# Altium PCB Cell Characterization Board V2.PcbDoc (part 3 of 3)
Units mm, origin at the board's own origin, x right, y up, seen from the top; angles counter-clockwise.
Board outline 180.24 x 170.15 mm, 4 copper layers (SIG1, GND, PWR, SIG2), stack 1.746 mm thick; 137 components, 113 nets, 550 pads, 376 vias.
Unrouted connection lines stored in the file: 58.
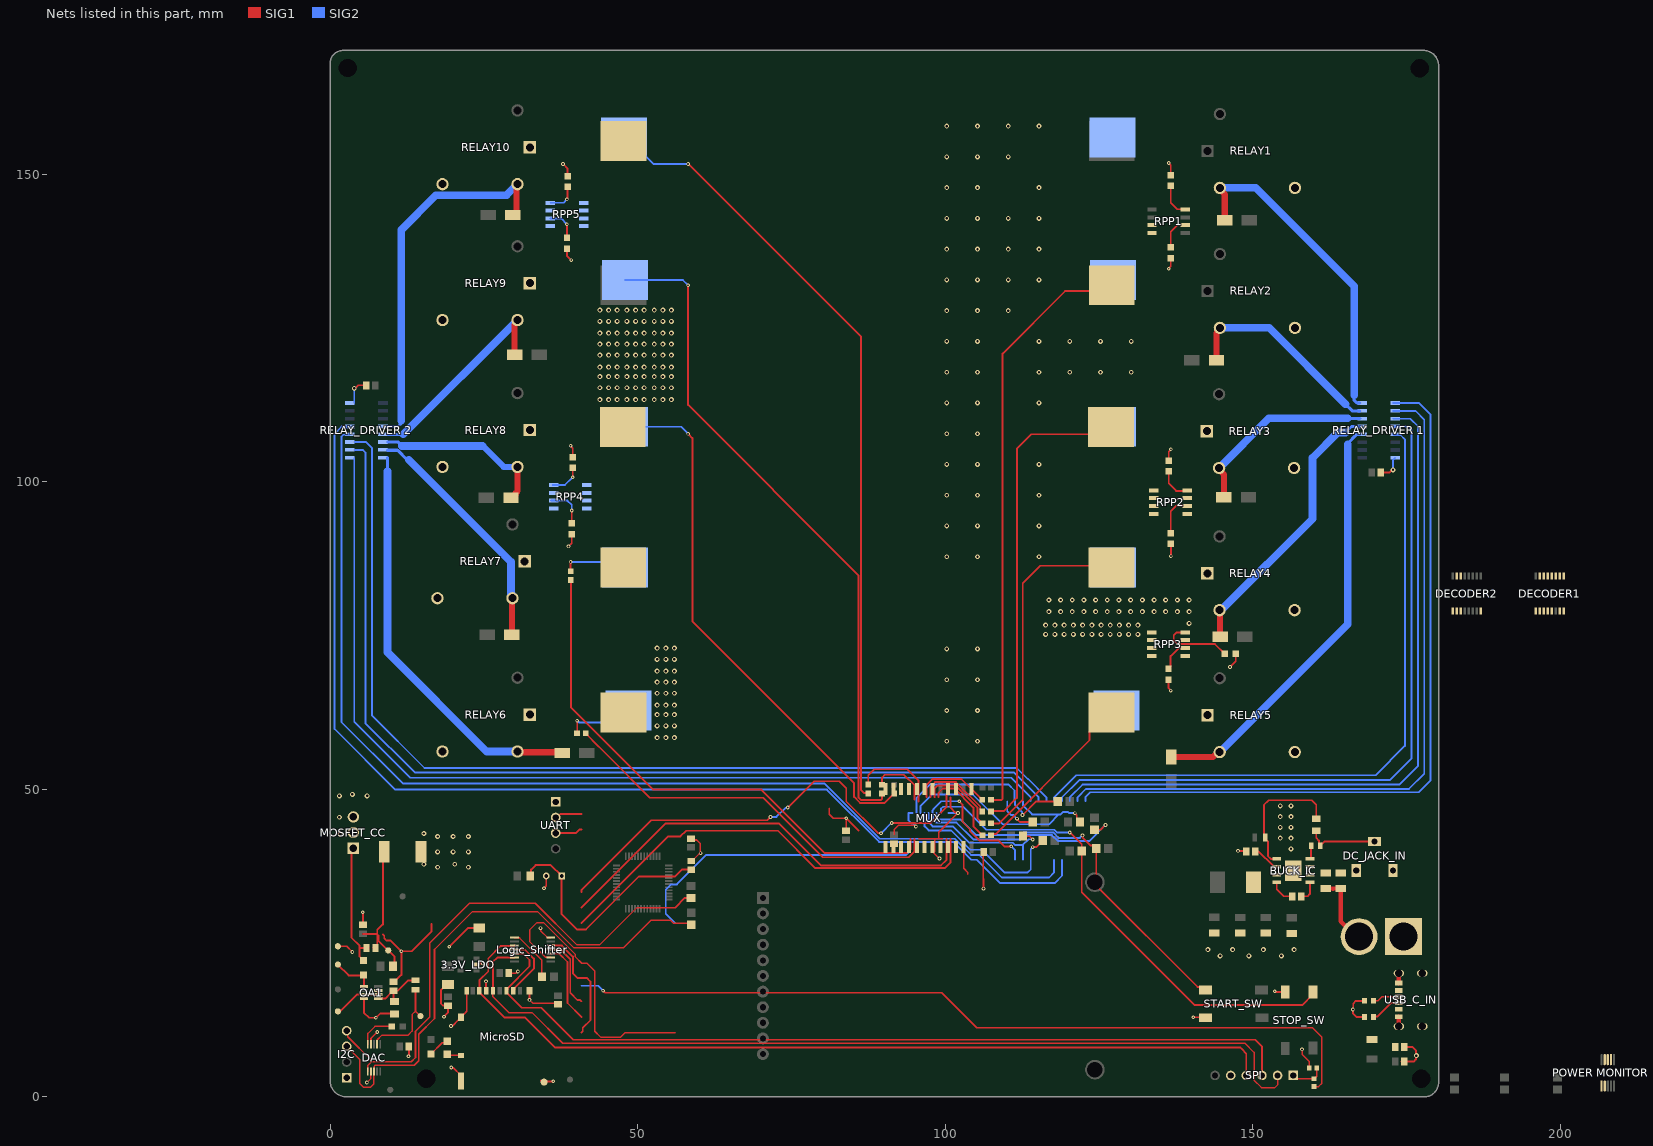
[diagram p4: the nets of this part, all layers, seen from the top]

## Via types
v1: diameter 0.8, hole 0.4, SIG1 to SIG2, tented both sides, 275 vias
v2: diameter 0.6, hole 0.3, SIG1 to SIG2, tented both sides, 92 vias
v3: diameter 1.27, hole 0.711, SIG1 to SIG2, tented both sides, 9 vias

## Nets (pads, with @x,y where several pads share a name; then routed paths per layer and width w, separated by ;. In a path a pad name is that pad's centre, name@x,y a point inside that pad or via, vN(x,y) a via of type N, cw(c..) or ccw(c..) an arc to the next point about the centre after c; other vN are vias at no path point) (continued)
CELL2_SIG: CELL2.2 R35.1 RPP1.7 RPP1.8 | length 96.7
  SIG1 w0.3: R35.1@107.444,48.287 109.171,48.287 109.347,48.463 109.347,120.853 119.516,131.022 126.143,131.022 CELL2.2@127.087,131.966
CELL3: RELAY3.1 RPP2.3
CELL3_SIG: CELL3.2 R34.1 RPP2.5 RPP2.6 | length 78.6
  SIG1 w0.3: R34.1@107.469,46.464 109.532,46.464 111.674,48.606 111.674,105.4 113.995,107.721 125.754,107.721 CELL3.2@126.96,108.928
CELL4: RELAY4.1 RPP2.1
CELL4_SIG: CELL4.2 R33.1 RPP2.7 RPP2.8 | length 57.7
  SIG1 w0.3: R33.1@107.479,44.454 108.782,44.454 112.615,48.287 112.615,83.532 115.446,86.363 126.74,86.363 CELL4.2@127.036,86.068
CELL5: RELAY5.1 RPP3.1
CELL5_SIG: CELL5.2 R32.1 RPP3.7 RPP3.8 | length 28.7
  SIG1 w0.3: R32.1@107.469,42.518 107.666,42.715 108.222,42.715 123.478,57.971 123.478,59.408 126.566,62.497 CELL5.2@127.061,62.497
CELL6: RELAY6.1 RPP3.3
  other v1: 139.665,76.986 116.865,78.886 118.765,78.886 120.665,78.886 122.565,78.886 124.465,78.886 126.365,78.886 128.265,78.886 130.165,78.886 132.065,78.886 133.965,78.886 135.865,78.886 137.765,78.886 139.665,78.886 116.865,80.786 118.765,80.786 120.665,80.786 122.565,80.786 124.465,80.786 126.365,80.786 128.265,80.786 130.165,80.786 132.065,80.786 133.965,80.786 135.865,80.786 137.765,80.786 139.665,80.786
CELL6_SIG: CELL6.2 R41.2 RPP3.5 RPP3.6 | length 11.3
  SIG1 w0.25: 40.167,59.131 v2(40.167,61.143)
  SIG2 w0.3: v2(40.167,61.143) 40.231,61.143 40.492,60.882 46.569,60.882 CELL6.2@48.501,62.814
  other v1: 116.347,75.189 117.847,75.189 119.347,75.189 120.847,75.189 122.347,75.189 123.847,75.189 125.347,75.189 126.847,75.189 128.347,75.189 129.847,75.189 131.347,75.189 116.347,76.689 117.847,76.689 119.347,76.689 120.847,76.689 122.347,76.689 123.847,76.689 125.347,76.689 126.847,76.689 128.347,76.689 129.847,76.689 131.347,76.689
CELL7: RELAY7.1 RPP4.1
CELL7_SIG: CELL7.2 R40.2 RPP4.7 RPP4.8 | length 10.7
  SIG1 w0.3: v2(39.116,86.978) 39.116,85.487 39.141,85.462
  SIG2 w0.3: v2(39.116,86.978) 47.019,86.978 CELL7.2@47.931,86.066
CELL8: RELAY8.1 RPP4.3
CELL8_SIG: CELL8.2 R39.1 RPP4.5 RPP4.6 | length 88.5
  SIG1 w0.3: v2(58.217,107.798) 58.903,107.112 58.903,77.296 85.208,50.99 85.208,48.757 86.162,47.803 90.179,47.803 91.383,49.007 91.406,49.007 91.712,49.313 R39.1@91.712,49.336
  SIG2 w0.3: CELL8.2@47.931,108.951 57.063,108.951 v2(58.217,107.798)
CELL9: RELAY9.1 RPP5.1
CELL9_SIG: CELL9.2 R38.1 RPP5.7 RPP5.8 | length 110.4
  SIG1 w0.3: v2(58.217,131.966) 58.217,112.497 85.907,84.807 85.907,48.681 86.344,48.243 89.562,48.243 89.738,48.419 R38.1@89.738,49.336
  SIG2 w0.3: CELL9.2@47.931,132.806 57.376,132.806 v2(58.217,131.966)
CELL10: RELAY10.1 RPP5.3
CELL10_SIG: CELL10.2 R37.1 RPP5.5 RPP5.6 | length 127
  SIG1 w0.3: v2(58.217,151.689) 86.347,123.559 86.347,49.856 86.777,49.426 87.433,49.426 R37.1@87.507,49.352
  SIG2 w0.3: CELL10.2@47.816,155.956 48.311,155.956 52.578,151.689 v2(58.217,151.689)
GND: 3.3V_LDO.2 "POWER MONITOR IC.1" "POWER MONITOR IC.2" "POWER MONITOR IC.7" "RELAY_DRIVER 1.8" "RELAY_DRIVER 2.8" BUCK_IC.7 BUCK_IC.9 C1.1 C2.1 C4.2 C5.1 C6.2 C7.2 C8.2 C9.2 C10.2 C11.2 C12.2 C14.1 C15.2 C16.2 C17.2 C19.1 C20.1 C21.1 C22.1 C23.2 C24.1 C25.1 C26.1 C27.1 CELL1.1 CELL3.1 CELL4.1 CELL5.1 CELL6.1 CELL7.1 CELL8.1 CELL9.1 CELL10.1 DAC.4 DAC.7 DC_JACK_IN.2 DC_JACK_IN.3 DECODER1.8 DECODER2.8 I2C.1 Logic_Shifter.7 MicroSD.6 MicroSD.9 MicroSD.11 MicroSD.12 MicroSD.13 MicroSD.14 MUX.12 MUX.15 MUX.16 MUX.17 MUX.18 MUX.19 MUX.20 MUX.21 NTC.2 OA1.4 pad.GND R3.1 R4.1 R9.1 R17.1 R20.1 R22.2 R23.2 R24.2 R25.2 R26.2 R27.2 R28.2 R29.2 R30.2 R31.2 R43.1 SHUNT.2 SPI.5 START_SW.3 STOP_SW.3 UART.1 USB_C_IN.1 USB_C_IN.2 USB_C_IN.3 USB_C_IN.4 USB_C_IN.A12 USB_C_IN.B12 XT60.N | length 200.6
  SIG1 w0.25: pad.GND@1.257,24.482 2.698,24.482 v2(3.623,23.556) ; v2(5.982,2.339) 6.642,2.999 DAC.7@6.642,4.109 ; DAC.4@6.642,8.541 6.652,8.552 6.652,9.536 v2(7.663,10.547) ; v2(19.662,11.529) 19.71,11.577 19.927,11.577 20.8,12.45 20.9,12.45 21.275,12.825 MicroSD.12@21.275,12.925 ; v2(19.71,4.776) 19.758,4.728 20.022,4.728 21.275,3.475 MicroSD.13@21.275,2.575 ; C26.1@29.05,20.099 30.177,20.099 30.457,20.379 v2(30.525,20.379) ; v2(32.425,15.761) 32.941,15.245 36.85,15.245 C27.1@37.075,15.02 ; v2(34.217,27.432) 34.265,27.384 34.265,26.98 35.35,25.894 Logic_Shifter.7@35.875,25.894 ; 91.712,42.578 91.712,43.471 92.37,44.129 94.97,44.129 95.145,43.954 v2(95.24,43.954) ; 95.682,41.956 96.332,41.956 96.982,41.956 97.632,41.956 98.282,41.956 ; v2(99.079,38.757) 99.026,38.757 98.15,39.633 98.15,39.758 98.282,39.891 98.282,41.956 ; 99.582,41.956 98.932,41.956 98.282,41.956 ; 106.186,35.414 106.186,39.751 C23.2@106.275,39.84 ; v2(158.03,7.719) 158.03,6.935 159.184,5.78 R43.1@159.184,4.72
  SIG1 w0.3: v1(3.929,115.197) 4.065,115.197 4.565,115.697 C19.1@5.904,115.697 ; v2(5.312,30.024) 5.348,29.988 C16.2@5.348,27.982 ; OA1.4@5.508,15.97 5.508,13.686 6.345,12.849 v2(7.442,12.849) ; v2@7.404,12.81 v2(7.442,12.849) ; 8.625,26.382 8.8,26.207 8.8,25.781 9.168,25.413 9.856,25.413 v2(11.588,23.682) ; C17.2@10.323,18.699 10.448,18.699 11.588,19.838 v2(11.588,23.682) ; R17.1@10.461,13.552 8.145,13.552 v2(7.442,12.849) ; v2(12.763,6.598) 12.763,6.652 12.838,6.727 C15.2@12.838,8.217 ; 16.495,28.082 16.495,26.913 13.264,23.682 v2(11.588,23.682) ; v2(18.514,13.025) 19.164,13.675 C20.1@19.164,14.807 19.146,14.825 18.364,14.825 18.014,15.175 18.014,17.299 18.964,18.249 C21.1@19.164,18.249 ; v2(19.383,24.409) 22.405,27.432 C22.1@24.275,27.432 ; MicroSD.12@21.275,13.025 21.625,13.375 21.687,13.375 22.225,13.913 MicroSD.9@22.225,17.225 ; 3.3V_LDO.2@23.787,21.51 23.967,21.69 24.309,21.69 24.313,21.693 v2(24.874,21.693) ; v2(25.342,18.775) 25.358,18.758 25.358,17.242 MicroSD.6@25.375,17.225 ; v2(32.425,15.761) MicroSD.11@32.425,17.125 ; 34.275,2.675 34.561,2.389 MicroSD.14@34.789,2.389 34.868,2.468 36.218,2.468 v2(36.275,2.525) ; v2(34.789,33.904) 34.789,33.958 35.15,34.319 NTC.2@35.15,35.922 ; v2(37.871,151.689) 38.623,150.937 R22.2@38.623,149.709 ; R27.2@38.503,137.905 38.503,136.757 v2(39.218,136.042) ; v2(38.76,89.51) 39.296,90.045 R30.2@39.296,91.487 ; v2(39.116,105.867) 39.116,105.786 39.446,105.456 R24.2@39.446,104.006 ; C24.1@58.701,41.998 58.938,41.762 59.625,41.762 60.193,41.194 60.193,39.68 v2(60.249,39.624) 60.191,39.567 60.064,39.567 58.846,38.349 C25.1@58.721,38.349 ; 81.153,46.858 81.153,45.933 81.798,45.288 v2(83.922,45.288) ; C4.2@83.922,43.29 v2(83.922,45.288) ; 85.949,43.261 v2(83.922,45.288) ; 98.932,41.956 98.954,41.978 98.954,43.021 v2(102.087,46.154) 102.033,46.208 101.68,46.208 100.882,47.005 100.882,48.707 ; v2(106.227,33.851) 106.227,35.414 ; R28.2@136.296,67.831 136.296,66.488 136.677,66.107 v2(136.677,66.053) ; v2(136.347,134.63) 136.347,134.684 136.677,135.014 R31.2@136.677,136.36 ; v2(136.347,151.841) 136.347,151.787 136.677,151.457 R26.2@136.677,149.873 ; R25.2@136.357,103.462 136.357,104.898 136.703,105.244 v2(136.703,105.298) ; R29.2@136.677,89.891 136.703,89.866 v2(136.703,87.909) ; v2(140.336,12.932) 142.285,12.932 START_SW.3@142.343,12.873 ; v2(146.304,69.875) 147.244,70.815 R23.2@147.244,72.029 ; v2(147.604,40) 148.87,40 C5.1@148.942,39.929 ; v2(153.594,17.17) 153.648,17.17 153.764,17.055 STOP_SW.3@155.311,17.055 ; R9.1@160.35,43.37 160.35,42.093 160.773,41.671 160.773,41.047 R20.1@160.998,40.822 ; R20.1@160.998,40.947 161.223,41.172 161.348,41.172 161.666,41.49 DC_JACK_IN.3@169.84,41.49 ; v2(166.298,14.215) 166.298,13.588 166.881,13.005 R4.1@168.181,13.005 ; v2@166.356,14.215 166.356,15.159 166.796,15.599 168.156,15.599 R3.1@168.181,15.623 ; C14.1@170.846,101.535 172.276,101.535 172.686,101.945 v1(172.821,101.945) ; C2.1@174.226,5.74 C2.1@174.613,5.74 176.194,5.74 176.535,6.081 176.535,6.622 v1(176.631,6.718) 176.535,6.814 176.535,7.55 175.969,8.116 174.665,8.116 C1.1@174.638,8.144
  SIG1 w0.7: C10.2@161.851,33.865 163.124,33.865 ; 163.073,33.815 163.124,33.865 ; XT60.N@167.31,26.045 166.796,26.045 164.301,28.54 C11.2@164.301,33.865 163.124,33.865
  SIG1 w0.75: USB_C_IN.2@173.781,11.453 USB_C_IN.A12@173.781,13.023 ; USB_C_IN.B12@173.781,18.51 USB_C_IN.B12@173.781,18.523 USB_C_IN.1@173.781,20.093
  SIG2 w0.3: 3.929,112.801 v1(3.929,115.197) ; v2@39.116,105.813 v2(39.116,105.867) ; 94.707,46.158 94.057,46.158 94.057,44.931 94.517,44.471 94.697,44.471 95.214,43.954 v2(95.24,43.954) ; 100.557,46.158 100.562,46.154 v2(102.087,46.154) ; v1(172.821,101.945) 172.821,103.538 173.194,103.911
  other v1: 144.707,22.933 149.39,22.933 154.663,22.933 142.726,23.924 146.747,23.924 151.747,23.924 156.747,23.924 17.491,37.327 22.491,37.327 15.264,37.82 20.264,37.82 17.491,39.827 19.991,39.827 22.491,39.827 156.234,40.311 154.484,42.061 156.234,42.061 17.491,42.327 19.991,42.327 22.491,42.327 15.264,42.82 154.484,43.811 156.234,43.811 154.484,45.561 156.234,45.561 154.484,47.311 156.234,47.311 100.264,57.82 105.264,57.82 53.179,58.4 54.595,58.4 55.976,58.4 53.179,60.327 54.595,60.327 55.976,60.327 53.179,62.143 54.595,62.143 55.976,62.143 100.264,62.82 105.264,62.82 53.179,63.7 54.595,63.7 55.976,63.7 53.179,65.627 54.595,65.627 55.976,65.627 53.179,67.443 54.595,67.443 55.976,67.443 100.264,67.82 105.264,67.82 53.179,69.205 54.595,69.205 55.976,69.205 53.179,71.133 54.595,71.133 55.976,71.133 100.264,72.82 105.264,72.82 53.179,72.949 54.595,72.949 55.976,72.949 100.264,87.82 105.264,87.82 115.264,87.82 100.264,92.82 105.264,92.82 115.264,92.82 100.264,97.82 105.264,97.82 115.264,97.82 100.264,102.82 105.264,102.82 115.264,102.82 100.264,107.82 105.264,107.82 100.264,112.82 105.264,112.82 115.264,112.82 43.878,113.36 45.294,113.36 46.675,113.36 48.248,113.36 49.664,113.36 51.045,113.36 52.7,113.36 54.116,113.36 55.497,113.36 43.878,115.287 45.294,115.287 46.675,115.287 48.248,115.287 49.664,115.287 51.045,115.287 52.7,115.287 54.116,115.287 55.497,115.287 43.878,117.103 45.294,117.103 46.675,117.103 48.248,117.103 49.664,117.103 51.045,117.103 52.7,117.103 54.116,117.103 55.497,117.103 100.264,117.82 105.264,117.82 115.264,117.82 120.264,117.82 125.264,117.82 130.264,117.82 43.878,118.66 45.294,118.66 46.675,118.66 48.248,118.66 49.664,118.66 51.045,118.66 52.7,118.66 54.116,118.66 55.497,118.66 43.878,120.587 45.294,120.587 46.675,120.587 48.248,120.587 49.664,120.587 51.045,120.587 52.7,120.587 54.116,120.587 55.497,120.587 43.878,122.403 45.294,122.403 46.675,122.403 48.248,122.403 49.664,122.403 51.045,122.403 52.7,122.403 54.116,122.403 55.497,122.403 100.264,122.82 105.264,122.82 115.264,122.82 120.264,122.82 125.264,122.82 130.264,122.82 43.878,124.166 45.294,124.166 46.675,124.166 48.248,124.166 49.664,124.166 51.045,124.166 52.7,124.166 54.116,124.166 55.497,124.166 43.878,126.093 45.294,126.093 46.675,126.093 48.248,126.093 49.664,126.093 51.045,126.093 52.7,126.093 54.116,126.093 55.497,126.093 100.264,127.82 105.264,127.82 110.264,127.82 43.878,127.909 45.294,127.909 46.675,127.909 48.248,127.909 49.664,127.909 51.045,127.909 52.7,127.909 54.116,127.909 55.497,127.909 100.264,132.82 105.264,132.82 110.264,132.82 115.264,132.82 100.264,137.82 105.264,137.82 110.264,137.82 115.264,137.82 100.264,142.82 105.264,142.82 110.264,142.82 115.264,142.82 100.264,147.82 105.264,147.82 115.264,147.82 100.264,152.82 105.264,152.82 110.264,152.82 100.264,157.82 105.264,157.82 110.264,157.82 115.264,157.82
I2C_SCL: DAC.6 I2C.4 R8.1 | length 86.7
  SIG1 w0.25: I2C.4@2.692,10.744 2.863,10.573 2.863,9.769 6.722,5.91 6.722,5.694 ; DAC.6@6.142,4.109 6.152,4.119 6.152,5.124 6.722,5.694 ; 56.109,30.772 49.9,30.772 43.823,24.695 40.141,24.695 33.357,31.479 22.686,31.479 16.176,24.97 16.176,12.944 13.888,10.656 13.888,6.377 13.204,5.694 6.722,5.694
  SIG1 w0.3: 56.109,30.772 57.674,32.337 R8.1@58.701,32.337
I2C_SDA: DAC.8 I2C.3 R5.1 | length 137
  SIG1 w0.25: I2C.3@2.692,8.204 4.797,6.1 4.797,2.206 5.439,1.564 6.585,1.564 7.132,2.111 7.132,4.099 DAC.8@7.142,4.109 7.152,4.119 7.152,4.929 7.346,5.124 13.698,5.124 14.426,5.851 14.426,10.187 16.975,12.736 16.975,23.962 23.078,30.065 33.796,30.065 39.651,24.21 47.68,24.21 52.145,28.675 55.376,28.675 55.819,28.232 56.109,28.232
  SIG1 w0.3: 56.109,28.232 58.667,28.232 58.721,28.286 R5.1@58.826,28.286
  SIG2 w0.3: 56.109,28.232 54.585,29.756 54.585,33.635 55.493,34.544 56.379,34.544 61.173,39.338 87.658,39.338 87.677,39.318 89.217,39.318 89.236,39.338 93.651,39.338 93.826,39.513 93.831,39.513 94.007,39.688 94.007,40.408 94.057,40.458
I_SET: "pad.TP_I SET" OA1.3 OA1.6 OA1.7 | length 8.3
  SIG1 w0.3: 1.257,13.9 1.391,14.034 1.754,14.034 4.339,16.62 OA1.3@5.508,16.62 OA1.6@7.808,16.62 OA1.7@7.808,17.27
LD_ADR1: DECODER1.1 DECODER2.1 RPU1.1 | length 30.8
  SIG1 w0.3: v2(112.59,45.828) 114.805,48.044 RPU1.1@118.324,48.044
  SIG2 w0.3: 95.357,46.158 95.357,48.602 97.53,50.775 110.312,50.775 111.276,49.811 111.276,48.162 111.379,48.058 111.379,47.408 112.551,46.236 112.551,45.867 v2(112.59,45.828)
LD_ADR2: DECODER1.2 DECODER2.2 RPU2.1 | length 38.8
  SIG1 w0.3: v2(121.095,46.134) 121.095,46.052 121.399,45.749 121.399,45.204 RPU2.1@121.924,44.679
  SIG2 w0.3: 96.007,46.158 96.007,47.299 97.848,49.139 104.532,49.139 109.348,44.323 116.909,44.323 118.509,45.923 ; 112.649,48.058 112.649,47.408 114.134,45.923 118.509,45.923 ; v2(121.095,46.134) 120.167,46.134 120.002,46.298 119.155,46.298 118.78,45.923 118.509,45.923
LD_ADR3: DECODER1.3 DECODER2.3 RPU3.1 | length 28.6
  SIG1 w0.3: v2(114.244,40.603) 114.844,40.603 115.319,41.078 115.369,41.078 115.894,41.603 RPU3.1@115.894,41.653
  SIG2 w0.3: 96.657,46.158 96.657,43.983 97.307,43.333 100.956,43.333 104.106,40.183 105.943,40.183 109.645,36.481 113.436,36.481 113.919,36.964 113.919,38.558 113.919,40.224 114.244,40.549 v2(114.244,40.603)
LD_ADR4: RPU4.1 | length 24.6
  SIG1 w0.3: RPU4.1@112.649,42.378 113.719,42.378 v2(114.244,41.853)
  SIG2 w0.3: 97.307,46.158 97.307,44.642 97.966,43.983 101.232,43.983 103.9,41.315 110.984,41.315 111.338,40.962 112.649,40.962 ; 112.649,38.558 112.649,40.962 ; v2(114.244,41.853) 114.206,41.892 113.579,41.892 112.649,40.962
LD_INH: DECODER1.4 RPU5.1 | length 55.5
  SIG1 w0.3: v2(102.291,48.058) 102.822,47.528 102.822,44.727 104.043,43.505 104.043,43.194 105.542,41.695 108.656,41.695 109.626,40.725 v2(110.74,40.725) ; RPU5.1@124.257,43.44 125.304,43.44 v2(126.06,44.196)
  SIG2 w0.3: v2(102.291,48.058) 102.284,48.066 99.334,48.066 98.117,46.849 98.117,46.718 97.957,46.558 97.957,46.158 98.007,46.108 98.007,45.073 98.478,44.602 101.836,44.602 104.585,41.853 112.266,41.853 112.962,42.549 117.372,42.549 118.307,41.614 123.478,41.614 v2(126.06,44.196) ; v2(110.74,40.725) 111.379,40.086 111.379,38.558
"MicroSD_CS 5V": Logic_Shifter.4 | length 11.7
  SIG1 w0.3: Logic_Shifter.4@35.875,23.944 37.491,23.944 39.042,22.393 39.042,16.908 40.204,15.745 40.655,15.745 40.869,15.532
MicroSD_CS_3.3V: Logic_Shifter.11 MicroSD.2 | length 10.4
  SIG1 w0.3: MicroSD.2@29.775,17.225 29.975,17.425 29.975,17.677 33.137,20.839 33.137,22.47 31.69,23.916 30.003,23.916 Logic_Shifter.11@29.975,23.944
MicroSD_DAT0_3.3V: Logic_Shifter.10 MicroSD.7 SPI.4 | length 143.6
  SIG1 w0.3: Logic_Shifter.10@29.975,24.594 29.923,24.541 27.77,24.541 25.725,22.497 25.725,20.379 24.275,18.929 MicroSD.7@24.275,17.225 24.275,16.975 28.325,12.925 31.652,12.925 36.576,8.002 148.02,8.002 148.196,7.826 148.196,7.818 148.971,7.043 SPI.4@148.971,3.48
MOS_G: "pad.TP_MOS G" OA1.1 R13.2 | length 6.9
  SIG1 w0.3: 1.257,21.51 3.018,19.749 5.37,19.749 R13.2@5.439,19.819 5.508,19.75 OA1.1@5.508,17.92
MOSFET_Temp: C25.2 NTC.1 R1.1 | length 39.5
  SIG1 w0.3: R1.1@32.522,35.922 32.676,36.076 32.676,36.946 33.415,37.685 35.887,37.685 NTC.1@37.65,35.922 37.65,29.68 40.095,27.235 41.612,27.235 50.229,35.852 56.109,35.852 57.211,36.955 58.665,36.955 C25.2@58.721,36.899
MOSI_3.3V: Logic_Shifter.12 MicroSD.3 SPI.3 | length 140.9
  SIG1 w0.3: Logic_Shifter.12@29.975,23.294 30.003,23.266 31.409,23.266 32.425,22.25 32.425,21.226 28.875,17.676 28.875,17.425 MicroSD.3@28.675,17.225 28.675,16.975 31.163,14.487 34.345,14.487 39.538,9.294 150.414,9.294 151.511,8.197 SPI.3@151.511,3.48
MUX_ADR0: MUX.10
MUX_ADR1: MUX.11 | length 75.6
  SIG1 w0.3: 40.869,33.312 40.869,33.614 41.228,33.973 41.228,33.989 52.21,44.971 71.095,44.971 71.095,45 v2(71.607,45.512) ; v2(74.422,47.041) 78.689,51.308 82.778,51.308 83.936,50.15 83.936,48.023 89.112,42.847 v2(89.562,42.847) ; v2(91.312,44.522) 91.334,44.544 97.634,44.544 100.232,47.142 100.232,49.178
  SIG2 w0.3: v2(71.607,45.512) 72.567,45.512 74.064,47.009 74.39,47.009 v2(74.422,47.041) ; v2(89.562,42.847) 89.6,42.847 91.274,44.522 v2(91.312,44.522)
MUX_ADR2: MUX.14 | length 71.7
  SIG1 w0.3: 40.869,30.772 54.566,44.469 72.93,44.469 79.775,37.624 99.333,37.624 100.232,38.523 100.232,41.956
MUX_ADR3: MUX.13 | length 73
  SIG1 w0.3: 40.869,28.232 54.976,42.34 56.957,42.34 57.882,43.265 72.826,43.265 78.907,37.184 99.902,37.184 100.882,38.164 100.882,41.956
MUX_OUT: "POWER MONITOR IC.8" MUX.1
NetBUCK_IC_1: BUCK_IC.1 C3.2 | length 3.4
  SIG1 w0.3: C3.2@157.907,32.614 158.937,32.614 159.311,32.988 BUCK_IC.1@159.311,34.869
NetBUCK_IC_4: BUCK_IC.4 R20.2 | length 2.3
  SIG1 w0.3: BUCK_IC.4@159.311,38.679 159.368,38.679 159.498,38.808 R20.2@159.498,40.822
NetBUCK_IC_5: BUCK_IC.5 R6.1 R9.2 | length 21.7
  SIG1 w0.3: BUCK_IC.5@153.926,38.679 153.906,38.699 152.941,38.699 152.496,39.144 152.496,41.55 151.846,42.2 151.846,47.479 152.602,48.235 159.634,48.235 160.35,47.518 R9.2@160.35,45.124
NetBUCK_IC_6: BUCK_IC.6 C5.2 | length 4.6
  SIG1 w0.25: C5.2@150.392,39.929 150.943,39.929
  SIG1 w0.3: 150.943,39.929 153.333,37.538 153.797,37.538 BUCK_IC.6@153.926,37.409
NetBUCK_IC_8: BUCK_IC.8 C3.1 L1.1 | length 4.1
  SIG1 w0.3: BUCK_IC.8@153.926,34.869 153.926,33.744 155.055,32.614 C3.1@156.457,32.614
NetC1_2: C1.2 FB1.2 USB_C_IN.A9 USB_C_IN.B9
NetC13_1: C13.1 MOSFET_CC.1 R13.1 | length 20.7
  SIG1 w0.3: MOSFET_CC.1@3.778,40.438 3.46,40.119 3.46,25.912 4.786,24.585 4.786,24.21 ; R13.1@5.439,22.169 4.786,22.822 4.786,24.21 ; C13.1@6.242,24.21 4.786,24.21
NetC17_1: C17.1 OA1.5 R14.1 R17.2 | length 9.1
  SIG1 w0.3: OA1.5@7.808,15.97 8.944,15.97 9.823,16.849 9.823,16.874 10.198,17.249 C17.1@10.323,17.249 ; R17.2@10.461,15.487 10.323,15.625 C17.1@10.323,17.249 ; R14.1@13.888,18.93 12.679,18.93 10.998,17.249 C17.1@10.323,17.249
NetD11_1: D11.1 R19.1 | length 2.3
  SIG1 w0.25: D11.1@19.062,6.952 19.289,6.725 21.275,6.725
NetD11_2: D11.2 MicroSD.10 | length 3.5
  SIG1 w0.25: 16.4,6.954 18.234,8.788 18.798,8.788 D11.2@19.062,9.052
NetDAC_2: DAC.2 pad.TP_3.3V@14.692,13.118 R14.2 | length 15.1
  SIG1 w0.25: DAC.2@7.642,8.541 7.652,8.552 7.652,9.268 8.361,9.977 12.629,9.977 13.338,10.686 13.338,13.373 13.888,13.923
  SIG1 w0.3: R14.2@13.888,17.378 13.888,13.923 pad.TP_3.3V@14.692,13.118
NetDAC_5: DAC.5 R12.2 | length 6.1
  SIG1 w0.25: DAC.5@6.142,8.541 6.152,8.552 6.152,10.317 7.288,11.453 R12.2@10.035,11.453
NetDECODER1_5: DECODER1.5 RPU8.2 | length 6.5
  SIG1 w0.3: v2(111.674,45.234) 111.674,45.181 112.177,44.679 RPU8.2@114.244,44.679
  SIG2 w0.3: 110.109,48.058 110.109,46.411 110.679,45.842 111.066,45.842 v2(111.674,45.234)
NetLogic_Shifter_8: Logic_Shifter.8 R21.1 | length 8.7
  SIG1 w0.25: Logic_Shifter.8@29.975,25.894 30.028,25.841 30.805,25.841 34.45,22.196 R21.1@34.45,19.529
NetMOSFET_CC_2: MOSFET_CC.2 RELAY1.3 RELAY2.3 RELAY3.3 RELAY4.3 RELAY5.3 RELAY6.3 RELAY7.3 RELAY8.3 RELAY9.3 RELAY10.3
  other v1: 1.626,42.723 1.499,45.466 1.499,48.946 6.034,48.946 3.623,49.174
NetMUX_3: MUX.3 R38.2 | length 9.7
  SIG1 w0.3: R38.2@89.738,50.74 89.738,51.906 90.194,52.362 93.305,52.362 95.032,50.635 95.032,48.315
NetMUX_4: MUX.4 R37.2 | length 14.3
  SIG1 w0.3: R37.2@87.507,50.756 87.507,52.324 88.447,53.264 93.83,53.264 95.682,51.412 95.682,48.017
NetMUX_6: MUX.6 R35.2 | length 12.9
  SIG1 w0.3: 96.982,48.707 96.982,50.716 97.93,51.664 102.664,51.664 105.711,48.616 105.711,48.593 106.017,48.287 R35.2@106.04,48.287
NetMUX_7: MUX.7 R34.2 | length 12.7
  SIG1 w0.3: 97.632,48.707 97.632,50.446 98.352,51.166 101.75,51.166 105.711,47.205 105.711,46.706 105.953,46.464 R34.2@106.065,46.464
NetMUX_8: MUX.8 R33.2 | length 13
  SIG1 w0.3: 98.282,48.707 98.29,48.715 98.29,50.159 98.766,50.635 101.617,50.635 105.271,46.98 105.271,45.234 105.97,44.535 R33.2@106.065,44.535
NetMUX_9: MUX.9 R32.2 | length 13.1
  SIG1 w0.3: 98.932,48.707 98.932,49.407 99.085,49.559 99.085,49.582 99.653,50.15 101.464,50.15 104.585,47.029 104.585,43.997 105.736,42.847 105.736,42.824 106.042,42.518 R32.2@106.065,42.518
NetMUX_22: MUX.22 R41.1 | length 64.3
  SIG1 w0.25: 41.571,59.131 41.594,59.131 41.925,58.8 41.925,58.714 42.649,57.99
  SIG1 w0.3: 42.649,57.99 44.857,55.782 51.996,48.643 70.437,48.643 80.128,38.951 94.081,38.951 95.032,39.902 95.032,41.956
NetMUX_23: MUX.23 R40.1 | length 92.5
  SIG1 w0.25: MUX.23@103.022,40.678 103.022,37.162 103.687,36.498 103.687,36.201
  SIG1 w0.3: 39.141,84.058 39.141,63.377 52.574,49.944 70.121,49.944 80.442,39.624 93.74,39.624 94.382,40.267 94.382,41.956
NetR3_2: R3.2 USB_C_IN.A5 | length 4.4
  SIG1 w0.3: R3.2@169.685,15.623 170.386,15.623 171.036,16.273 USB_C_IN.A5@173.781,16.273
NetR4_2: R4.2 USB_C_IN.B5 | length 5
  SIG1 w0.3: R4.2@169.703,13.022 169.77,13.09 170.345,13.09 172.529,15.273 USB_C_IN.B5@173.781,15.273
NetR22_1: R22.1 RPP5.4 | length 5
  SIG1 w0.3: v2(38.503,145.917) 38.503,145.998 38.623,146.119 R22.1@38.623,147.955
  SIG2 w0.3: RPP5.4@35.791,145.372 37.958,145.372 v2(38.503,145.917)
NetR23_1: R23.1 RPP3.4 | length 12.1
  SIG1 w0.3: RPP3.4@139.014,75.514 137.657,75.514 137.183,75.041 137.183,74.184 137.738,73.629 143.867,73.629 145.467,72.029 R23.1@145.49,72.029
NetR24_1: R24.1 RPP4.4 | length 5.3
  SIG1 w0.3: v2(39.446,100.745) R24.1@39.446,102.253
  SIG2 w0.3: RPP4.4@36.16,99.49 38.192,99.49 v2(39.446,100.745)
NetR25_1: R25.1 RPP2.4 | length 5.5
  SIG1 w0.3: R25.1@136.357,101.709 136.357,99.73 137.564,98.523 RPP2.4@139.364,98.523
NetR26_1: R26.1 RPP1.4 | length 5.6
  SIG1 w0.3: R26.1@136.677,148.12 136.677,145.374 137.728,144.323 RPP1.4@139.129,144.323
NetR27_1: R27.1 RPP5.2 | length 5.3
  SIG1 w0.3: R27.1@38.503,139.659 v2(38.503,141.887)
  SIG2 w0.3: RPP5.2@35.791,142.832 37.558,142.832 v2(38.503,141.887)
NetR28_1: R28.1 RPP3.2 | length 5.1
  SIG1 w0.3: R28.1@136.296,69.585 136.652,69.941 136.652,71.662 137.965,72.974 RPP3.2@139.008,72.974
NetR29_1: R29.1 RPP2.2 | length 6.7
  SIG1 w0.3: R29.1@136.677,91.644 136.677,95.219 137.597,96.139 RPP2.2@139.389,96.139
NetR30_1: R30.1 RPP4.2 | length 6.6
  SIG1 w0.3: R30.1@39.296,93.241 v2(39.296,95.34)
  SIG2 w0.3: RPP4.2@35.944,96.95 38.592,96.95 39.296,96.246 v2(39.296,95.34)
NetR31_1: R31.1 RPP1.2 | length 5.4
  SIG1 w0.3: R31.1@136.677,138.113 136.677,140.636 137.824,141.783 RPP1.2@139.129,141.783
RD1: "RELAY_DRIVER 1.1" DECODER1.15 | length 124.3
  SIG2 w0.3: 122.809,48.058 122.809,48.708 123.631,49.53 177.013,49.53 178.943,51.46 178.943,110.922 177.063,112.801 172.821,112.801
RD2: "RELAY_DRIVER 1.2" DECODER1.13 | length 121.8
  SIG2 w0.3: 121.539,48.058 121.539,48.708 122.886,50.056 175.405,50.056 177.902,52.553 177.902,110.109 176.479,111.531 172.821,111.531
RD3: "RELAY_DRIVER 1.3" DECODER1.14 | length 119.2
  SIG2 w0.3: 120.269,48.058 120.269,48.708 122.335,50.775 173.863,50.775 176.899,53.811 176.899,108.991 175.629,110.261 172.821,110.261
RD4: "RELAY_DRIVER 1.4" DECODER1.12 | length 116.8
  SIG2 w0.3: 118.999,48.058 118.999,48.708 121.802,51.511 172.295,51.511 175.845,55.061 175.845,108.432 175.285,108.991 172.821,108.991
RD5: "RELAY_DRIVER 1.5" DECODER1.11 | length 113.2
  SIG2 w0.3: 117.729,48.058 117.729,48.708 121.319,52.299 169.995,52.299 174.752,57.056 174.752,106.903 174.042,107.612 172.93,107.612 172.821,107.721
RD6: "RELAY_DRIVER 2.1" DECODER1.7 | length 158.6
  SIG2 w0.3: 3.929,103.911 3.929,61.004 13.058,51.875 110.753,51.875 113.919,48.708 113.919,48.058
RD7: "RELAY_DRIVER 2.2" DECODER1.9 | length 161.1
  SIG2 w0.3: 3.929,105.181 5.331,105.181 5.747,104.766 5.747,60.776 13.771,52.751 111.146,52.751 115.189,48.708 115.189,48.058
RD8: "RELAY_DRIVER 2.3" DECODER1.10 | length 162.6
  SIG2 w0.3: 3.929,106.451 5.869,106.451 6.839,105.481 6.839,61.979 15.352,53.467 111.645,53.467 113.436,51.676 113.492,51.676 116.459,48.708 116.459,48.058
RD9: "RELAY_DRIVER 2.4" DECODER2.15 | length 176.7
  SIG2 w0.3: 3.204,107.735 3.132,107.663 2.165,107.663 1.854,107.352 1.854,60.942 11.87,50.927 80.419,50.927 89.39,41.956 101.588,41.956 104.226,39.318 105.584,39.318 109.24,35.662 116.91,35.662 117.729,36.481 117.729,38.558
RD10: "RELAY_DRIVER 2.5" DECODER2.14 | length 182.8
  SIG2 w0.3: 3.204,109.005 3.168,108.969 1.853,108.969 0.72,107.836 0.72,59.812 10.588,49.944 80.78,49.944 89.266,41.458 101.341,41.458 104.241,38.558 105.155,38.558 108.964,34.749 117.807,34.749 118.999,35.941 118.999,38.558
RELAY1_SW: "RELAY_DRIVER 1.16" D1.1 RELAY1.2 | length 53.7
  SIG1 w1: RELAY1.2@144.673,147.788 144.673,147.518 145.472,146.719 D1.1@145.472,142.545
  SIG2 w0.5: 166.506,114.113 166.506,113.241 166.946,112.801 167.421,112.801
  SIG2 w1.25: RELAY1.2@144.673,147.788 150.509,147.788 166.506,131.792 166.506,114.113
RELAY2_SW: "RELAY_DRIVER 1.15" D2.1 RELAY2.2 | length 33.9
  SIG1 w1: D2.1@144.113,119.736 144.113,124.199 144.673,124.759 RELAY2.2@144.673,125.03
  SIG2 w0.5: 165.1,112.606 166.175,111.531 167.421,111.531
  SIG2 w1.25: RELAY2.2@144.673,125.03 152.677,125.03 165.1,112.606
RELAY3_SW: "RELAY_DRIVER 1.14" D3.1 RELAY3.2 | length 31.3
  SIG1 w1: RELAY3.2@144.546,102.242 144.546,101.971 145.325,101.192 D3.1@145.325,97.522
  SIG2 w0.5: 165.415,110.331 165.485,110.261 167.421,110.261
  SIG2 w1.25: RELAY3.2@144.546,102.242 152.636,110.331 165.415,110.331
RELAY4_SW: "RELAY_DRIVER 1.13" D4.1 RELAY4.2 | length 45.3
  SIG1 w1: RELAY4.2@144.623,79.132 144.668,79.086 144.668,74.882 D4.1@144.714,74.836
  SIG2 w0.5: 165.1,108.021 166.07,108.991 167.421,108.991
  SIG2 w1.25: RELAY4.2@144.623,79.132 144.826,79.132 145.201,79.507 145.268,79.507 159.741,93.98 159.741,103.937 163.825,108.021 165.1,108.021
RELAY5_SW: "RELAY_DRIVER 1.12" D5.1 RELAY5.2 | length 69.6
  SIG1 w1: D5.1@136.754,55.264 143.58,55.264 144.377,56.061 RELAY5.2@144.648,56.061
  SIG2 w0.5: 165.45,106.1 165.45,106.225 166.946,107.721 167.421,107.721
  SIG2 w1.25: RELAY5.2@144.648,56.061 165.45,76.863 165.45,106.1
RELAY6_SW: "RELAY_DRIVER 2.16" D6.1 RELAY6.2 | length 66.8
  SIG1 w1: RELAY6.2@30.472,56.143 30.591,56.024 37.607,56.024 D6.1@37.726,55.905
  SIG2 w0.5: 9.329,101.715 9.329,103.911
  SIG2 w1.25: 9.329,101.715 9.329,72.281 25.467,56.143 RELAY6.2@30.472,56.143
RELAY7_SW: "RELAY_DRIVER 2.15" D7.1 RELAY7.2 | length 39.6
  SIG1 w1: D7.1@29.534,75.133 29.59,75.189 29.59,81.015 RELAY7.2@29.646,81.071
  SIG2 w0.5: 9.329,105.181 9.379,105.131 10.975,105.131 12.5,103.607 12.776,103.607
  SIG2 w1.25: 12.776,103.607 29.404,86.978 29.404,81.843 29.503,81.745 29.503,81.215 RELAY7.2@29.646,81.071
RELAY8_SW: "RELAY_DRIVER 2.14" D8.1 RELAY8.2 | length 28.5
  SIG1 w1: D8.1@29.404,97.415 29.804,97.415 30.154,97.765 30.154,98.165 30.472,98.482 RELAY8.2@30.472,102.423
  SIG2 w0.5: 9.329,106.451 11.091,106.451 11.705,105.837
  SIG2 w1: 24.795,105.837 28.21,102.423 RELAY8.2@30.472,102.423
  SIG2 w1.25: 11.705,105.837 24.795,105.837
RELAY9_SW: "RELAY_DRIVER 2.13" D9.1 RELAY9.2 | length 34.7
  SIG1 w1: D9.1@30.004,120.625 30.004,125.56 30.472,126.027 RELAY9.2@30.472,126.298
  SIG2 w0.5: 9.329,107.721 11.887,107.721
  SIG2 w1.25: 11.887,107.721 11.895,107.721 RELAY9.2@30.472,126.298
RELAY10_SW: "RELAY_DRIVER 2.12" D10.1 RELAY10.2 | length 60.9
  SIG1 w1: D10.1@29.686,143.383 29.93,143.383 30.28,143.733 30.28,148.201 RELAY10.2@30.472,148.392
  SIG2 w0.5: 9.329,108.991 11.03,108.991 11.557,109.518
  SIG2 w1.25: 11.557,109.961 11.557,140.945 17.204,146.592 28.672,146.592 RELAY10.2@30.472,148.392
SCK_3.3V: Logic_Shifter.13 MicroSD.5 SPI.2 | length 147.5
  SIG1 w0.25: MicroSD.5@26.475,17.225 26.475,16.257 29.033,13.699 32.84,13.699 37.844,8.695 148.776,8.695 150.241,7.23 150.241,2.705 151.44,1.506 153.626,1.506 154.051,1.93 SPI.2@154.051,3.48
  SIG1 w0.3: MicroSD.5@26.475,17.225 26.475,21.93 27.189,22.644 Logic_Shifter.13@29.975,22.644
SHUNT+: "pad.TP_I SENSE RAW" C13.2 MOSFET_CC.3 R15.2 SHUNT.1 | length 25.1
  SIG1 w0.3: 5.348,26.482 7.575,26.482 7.675,26.382 ; C13.2@7.042,24.21 7.675,24.844 7.675,26.382 ; SHUNT.1@8.819,39.827 8.59,39.599 8.59,28.046 7.675,27.132 7.675,26.382 ; R15.2@10.488,21.213 10.488,22.775 7.85,25.413 7.85,26.207 7.675,26.382
SHUNT-: "POWER MONITOR IC.9"
SPI_CS: R42.2 | length 132.8
  SIG1 w0.25: v2(44.399,17.247) 44.738,16.908 99.441,16.908 105.13,11.22 159.738,11.22 161.257,9.701 161.257,2.226 160.709,1.678 R42.2@159.986,1.678
  SIG2 w0.3: 40.869,18.072 43.574,18.072 v2(44.399,17.247)
SPI_CS_3.3V: R42.1 R43.2 SPI.1 | length 5.6
  SIG1 w0.25: SPI.1@156.591,3.48 157.139,2.932 R42.1@159.986,2.932 160.013,2.932 160.438,3.357 R43.2@160.438,4.72
"SPI_MISO 5V": Logic_Shifter.5 | length 19.4
  SIG1 w0.3: Logic_Shifter.5@35.875,24.594 37.699,24.594 39.482,22.811 39.482,20.082 40.222,19.342 41.745,19.342 42.342,18.745 42.342,12.471 41.082,11.211 41.082,10.665 40.869,10.452
"SPI_MOSI 5V": Logic_Shifter.3 | length 13.2
  SIG1 w0.3: Logic_Shifter.3@35.875,23.294 37.236,23.294 38.602,21.928 38.602,15.259 40.869,12.992
"SPI_SCK 5V": Logic_Shifter.2 | length 44.5
  SIG1 w0.25: Logic_Shifter.2@35.875,22.644 35.829,22.69 35.012,22.69 32.425,25.277 32.425,27.132 33.621,28.328 34.695,28.328 39.897,23.127 39.897,22.75 40.934,21.712 41.765,21.712 43.02,20.457 43.02,10.675 43.987,9.709 47.25,9.709 47.993,10.452 56.109,10.452
START_SW: RPU6.1 START_SW.1 | length 60.6
  SIG1 w0.3: v2(122.335,42.52) 122.359,42.496 122.359,42.154 123.628,40.885 124.096,40.885 RPU6.1@124.577,40.403 124.577,34.325 141.043,17.86 141.857,17.86 START_SW.1@142.343,17.373
  SIG2 w0.3: 98.607,46.158 98.607,45.308 98.816,45.099 102.449,45.099 104.953,42.596 112.387,42.596 112.779,42.989 117.554,42.989 118.434,42.109 121.924,42.109 v2(122.335,42.52)
STOP_SW: RPU7.1 STOP_SW.1 | length 80.3
  SIG1 w0.3: v2(120.269,42.989) 122.224,41.034 RPU7.1@122.224,40 122.224,33.3 140.601,14.923 158.03,14.923 159.811,16.705 STOP_SW.1@159.811,17.055
  SIG2 w0.3: 99.257,46.158 99.307,46.208 99.307,46.808 99.658,47.159 102.955,47.159 106.686,43.429 117.736,43.429 118.176,42.989 v2(120.269,42.989)
UART_RX: UART.3 | length 4.4
  SIG1 w0.3: UART.3@36.681,42.875 39.97,42.875 40.567,43.472 40.869,43.472
UART_TX: UART.2 | length 4.4
  SIG1 w0.3: UART.2@36.681,45.415 36.894,45.415 37.491,46.012 40.869,46.012
V_IN: BUCK_IC.2 BUCK_IC.3 C10.1 C11.1 DC_JACK_IN.1 XT60.P
pads on no net: 3.3V_LDO.4 "POWER MONITOR IC.4" "POWER MONITOR IC.5" "POWER MONITOR IC.10" "RELAY_DRIVER 1.6" "RELAY_DRIVER 1.7" "RELAY_DRIVER 1.10" "RELAY_DRIVER 1.11" "RELAY_DRIVER 2.6" "RELAY_DRIVER 2.7" "RELAY_DRIVER 2.10" "RELAY_DRIVER 2.11" CELL2.1 DAC.3 DAC.9 DECODER1.6 DECODER2.4 DECODER2.5 DECODER2.6 DECODER2.7 DECODER2.9 DECODER2.10 DECODER2.11 DECODER2.12 DECODER2.13 DS1.1 DS1.2 DS1.3 DS1.4 DS1.5 DS1.6 DS1.7 DS1.8 DS1.9 DS1.10 DS1.11 DS1.SH1 DS1.SH2 Logic_Shifter.6 Logic_Shifter.9 MicroSD.1 MicroSD.8 MUX.2 MUX.5 R36.2 R39.2 RPU9.1 RPU10.1 START_SW.2 START_SW.4 STOP_SW.2 STOP_SW.4 U1.1 U1.2 U1.3 U1.4 U1.5 U1.6 U1.7 U1.8 U1.9 U1.10 U1.11 U1.12 U1.13 U1.14 U1.15 U1.16 U1.17 U1.18 U1.19 U1.20 U1.21 U1.22 U1.23 U1.24 U1.25 U1.26 U1.27 U1.28 U1.29 U1.30 U1.31 U1.32 U1.33 U1.34 U1.35 U1.36 U1.37 U1.38 U1.39 U1.40 U1.41 U1.42 U1.43 U1.44 U1.45 U1.46 U1.47 U1.48 UART.4
copper on no net: | length 614
  SIG1 w0.25: 11.756,26.107 11.763,26.114 11.763,27.181 ; 68.127,35.414 68.127,39.492 v2(67.187,40.432) 67.282,40.432 67.674,40.825 69.142,40.825 69.246,40.928 ; 70.997,40.928 70.997,40.825 73.207,38.615 73.207,35.414
  SIG1 w0.3: v2(7.118,30.582) 7.675,30.024 7.675,28.782 ; 9.575,26.382 9.575,26.282 9.75,26.107 11.756,26.107 13.761,26.107 14.442,26.789 14.442,28.081 ; 9.575,28.782 11.763,28.782 ; 11.794,32.605 11.794,28.813 11.763,28.782 ; 40.869,35.852 52.321,47.305 70.833,47.305 v2(71.394,46.744) ; 56.109,18.072 55.895,18.285 54.511,18.285 52.572,20.225 52.572,25.033 54.272,26.733 60.243,26.733 65.329,31.819 65.329,40.919 66.749,42.34 72.494,42.34 v2(72.873,41.961) ; 56.109,20.612 68.993,20.612 80.827,32.446 80.827,35.414 ; 56.109,23.152 64.732,23.152 75.747,34.167 75.747,35.414 ; 56.109,25.692 55.945,25.528 55.236,25.528 54.585,24.876 54.585,20.432 55.657,19.36 85.052,19.36 101.106,35.414 ; 56.109,33.312 49.619,33.312 42.989,26.682 41.289,26.682 41.282,26.689 40.456,26.689 40.448,26.682 39.266,26.682 33.342,32.605 15.618,32.605 12.268,29.255 12.268,29.036 12.013,28.782 11.763,28.782 ; v2(73.584,48.031) 77.497,51.944 83.035,51.944 84.621,50.358 84.621,48.061 87.25,45.432 97.477,45.432 99.582,47.538 99.582,48.707 ; v2(75.514,46.012) 80.175,50.673 82.436,50.673 83.272,49.837 83.272,47.186 83.096,47.01 82.103,47.01 82.103,49.126 ; v2(78.246,46.591) 78.246,47.868 79.336,48.958 80.028,48.958 80.203,49.133 80.203,49.258 ; 89.07,46.309 90.966,46.309 93.25,48.593 93.675,48.593 93.732,48.651 93.732,48.707 ; 91.712,50.74 93.684,50.74 94.36,50.063 94.36,48.214 94.382,48.192 ; 96.332,48.032 96.332,51.166 97.528,52.362 104.338,52.362 105.771,50.929 105.771,50.545 106.065,50.251
  SIG2 w0.3: 40.869,20.612 42.412,22.155 85.307,22.155 98.566,35.414 ; 40.869,23.152 42.412,24.695 85.307,24.695 96.026,35.414 ; 40.869,25.692 42.412,27.235 85.307,27.235 93.486,35.414 ; 56.109,30.772 60.739,30.772 68.667,38.701 93.831,38.701 94.707,39.577 94.707,40.458 ; 70.667,35.414 70.667,34.003 v2(71.607,33.064) ; v2(71.394,46.744) 72.296,46.744 v2(73.584,48.031) ; v2(72.873,41.961) 75.514,44.602 v2(75.514,46.012) ; v2(77.013,33.635) 77.07,33.693 77.07,34.238 77.943,35.111 77.943,35.55 ; 78.246,35.414 78.548,35.716 78.548,36.462 80.323,38.238 94.422,38.238 95.357,39.172 95.357,40.458 ; 124.079,48.058 125.32,48.058 125.471,48.209 v2(125.552,48.209)

## Polygon pours and split planes (outlines as drawn)
GND on SIG2 "GND_L04_P104" (solid, pour order 104): -0.077,170.151 -0.073,170.155 180.238,170.155 180.238,0 0,0 0,170.155
CELL6_SIG on SIG2 "CELL6_SIG_L04_P082" (solid, pour order 82): 136.677,73.711 136.677,77.826 42.977,77.826 42.901,77.902 42.901,59.131 52.154,59.131 52.312,59.29 52.312,73.711
CELL9_SIG on SIG2 "CELL9_SIG_L04_P088" (solid, pour order 88): 40.157,128.676 56.448,128.676 56.448,143.305 40.157,143.305
CELL10_SIG on SIG2 "CELL10_SIG_L04_P089" (solid, pour order 89): 40.103,143.777 56.393,143.777 56.393,160.528 40.103,160.528
CELL7_SIG on SIG2 "CELL7_SIG_L04_P086" (solid, pour order 86): 40.758,82.787 57.048,82.787 57.048,97.415 40.758,97.415
CELL8_SIG on SIG2 "CELL8_SIG_L04_P087" (solid, pour order 87): 40.758,97.555 57.048,97.555 57.048,112.417 40.758,112.417
GND on SIG2 "GND_L04_P092" (solid, pour order 92): 58.903,73.049 134.747,73.049 134.747,55.873 58.903,55.873
CELL6 on SIG2 "CELL6_L04_P083" (solid, pour order 83): 137.896,73.919 141.623,73.919 141.623,82.321 31.598,82.321 31.598,58.788 38.821,58.788 38.984,58.887 38.913,64.033 42.418,64.033 42.418,78.232 137.896,78.232
CELL9 on SIG2 "CELL9_L04_P091" (solid, pour order 91): 36.835,128.453 36.835,141.961 31.53,141.961 31.439,128.453
CELL10 on SIG2 "CELL10_L04_P090" (solid, pour order 90): 31.472,158.372 31.472,143.467 36.903,143.467 37.003,158.372
CELL8 on SIG2 "CELL8_L04_P085" (solid, pour order 85): 31.431,112.576 31.431,97.555 37.289,97.555 37.39,112.576
CELL7 on SIG2 "CELL7_L04_P084" (solid, pour order 84): 31.457,96.112 31.457,82.827 31.485,82.855 37.465,82.855 37.554,96.112
GND on SIG2 "GND_L04_P053" (solid, pour order 53): 135.072,82.067 135.117,159.566 59.157,159.566 59.157,82.067
GND on SIG1 "GND_L01_P103" (solid, pour order 103): 0,170.155 180.238,170.155 180.238,0 -0.254,0 -0.254,170.046 -0.153,170.147
CELL1_SIG on SIG1 "CELL1_SIG_L01_P068" (solid, pour order 68): 115.57,159.566 115.599,159.537 134.817,159.537 134.817,142.518 115.57,142.518
CELL2_SIG on SIG1 "CELL2_SIG_L01_P070" (solid, pour order 70): 115.57,142.412 115.599,142.383 134.817,142.383 134.817,125.363 115.57,125.363
CELL6_SIG on SIG1 "CELL6_SIG_L01_P080" (solid, pour order 80): 115.672,77.826 136.677,77.826 136.677,73.919 115.672,73.919
CELL5_SIG on SIG1 "CELL5_SIG_L01_P076" (solid, pour order 76): 134.696,70.776 132.222,70.776 134.696,70.776 134.696,70.411 134.668,56.589 115.449,56.589 115.449,73.609 134.696,73.609
CELL3_SIG on SIG1 "CELL3_SIG_L01_P074" (solid, pour order 74): 115.83,113.822 115.859,113.794 135.077,113.794 135.077,96.774 115.83,96.774
CELL4_SIG on SIG1 "CELL4_SIG_L01_P075" (solid, pour order 75): 135.077,82.321 115.83,82.321 115.83,96.518 135.077,96.518
NetC1_2 on SIG1 "NETC1_2_L01_P100" (solid, pour order 100): 174.381,16.913 174.381,17.673 171.26,18.273 161.851,18.273 161.851,7.494 173.698,7.494 173.698,10.452 172.831,10.452 172.831,13.665 cw(c173.04,13.665) 173.04,13.873 174.381,13.873 174.381,14.633 172.886,14.633 ccw(c172.886,13.675) 172.102,14.226 170.516,11.968 165.532,11.968 165.532,16.705 165.74,16.913 174.381,16.913 165.74,16.913
5V on SIG1 "5V_L01_P099" (solid, pour order 99): 161.646,7.024 173.888,7.024 173.888,0.889 161.646,0.889
SHUNT+ on SIG1 "SHUNT+_L01_P098" (solid, pour order 98): 2.529,46.583 10.267,46.583 10.267,36.475 5.637,36.475 5.637,44.145 2.529,44.145
V_IN on SIG1 "V_IN_L01_P063" (solid, pour order 63): 165.664,35.544 165.664,29.521 170.636,29.521 170.636,22.062 179.146,22.062 179.146,29.29 179.146,35.544 171.819,35.544 171.819,38.092 158.6,38.092 158.6,35.544
GND on SIG1 "GND_L01_P093" (solid, pour order 93): 152.961,36.994 154.9,36.994 154.9,39.504 152.861,39.504 152.861,47.879 158.432,47.879 158.432,33.714 154.939,33.714 154.939,35.74 152.961,35.74
CELL6 on SIG1 "CELL6_L01_P081" (solid, pour order 81): 137.896,78.132 137.896,73.919 141.623,73.919 141.623,81.916 115.672,81.916 115.672,78.132
CELL5 on SIG1 "CELL5_L01_P077" (solid, pour order 77): 137.896,57.586 143.612,57.586 143.612,72.535 137.896,72.535
CELL3 on SIG1 "CELL3_L01_P073" (solid, pour order 73): 137.978,96.774 143.485,96.774 143.485,110.871 137.978,110.871
CELL4 on SIG1 "CELL4_L01_P072" (solid, pour order 72): 138.033,82.586 143.54,82.586 143.54,95.594 138.033,95.594
CELL2 on SIG1 "CELL2_L01_P071" (solid, pour order 71): 138.1,128.118 143.606,128.118 143.606,141.142 138.1,141.142
CELL1 on SIG1 "CELL1_L01_P069" (solid, pour order 69): 138.117,142.418 143.623,142.418 143.623,156.515 138.117,156.515
GND on SIG1 "GND_L01_P067" (solid, pour order 67): 12.138,44.145 12.172,44.179 24.275,44.179 24.275,35.576 12.138,35.576
GND on SIG1 "GND_L01_P065" (solid, pour order 65): 141.636,27.725 158.031,27.725 158.031,22.112 141.636,22.112
5V on SIG1 "5V_L01_P062" (solid, pour order 62): 141.636,37.409 141.636,28.203 157.698,28.203 cw(c157.698,27.603) 158.298,27.603 158.298,20.599 162.432,20.599 162.432,31.1 146.893,31.1 cw(c146.892,31.885) 146.106,31.885 146.106,37.409
NetBUCK_IC_8 on SIG1 "NETBUCK_IC_8_L01_P064" (solid, pour order 64): 148.316,31.885 154.637,31.885 154.637,35.544 152.861,35.544 152.861,37.13 148.316,37.13 148.316,37.017 148.316,37.13 148.316,37.017
GND on SIG1 "GND_L01_P054" (solid, pour order 54): 42.901,160.392 57.198,160.392 57.198,58.064 42.901,58.064
GND on GND "GND_L02_P095" (solid, pour order 95): 0,170.155 180.238,170.155 180.238,8.875 180.238,5.74 180.238,0 174.638,0 171.363,0 0,0
NetMOSFET_CC_2 on PWR "NETMOSFET_CC_2_L03_P037" (solid, pour order 37): 7.183,170.155 172.879,170.155 174.473,170.155 180.238,170.155 180.242,164.368 179.96,113.99 179.826,53.67 151.179,53.67 151.179,161.327 23.432,161.851 23.052,44.331 10.226,44.331 10.226,46.738 2.374,46.787 2.374,44.145 5.461,44.145 5.461,36.475 -0.064,36.475 -0.15,162.817 -0.153,164.744 0,170.155 5.461,170.155
5V on PWR "5V_L03_P097" (solid, pour order 97): 0,170.155 180.238,170.155 180.238,0 0,0

## Keep-outs
SIG1:
  region: -24.994,11.596 -41.097,11.596 -41.91,11.596 -41.91,31.738 -41.91,73.394 -0.254,73.394 -0.254,11.596
Keep-Out Layer:
  circle w0.254: c2.87,167.28 r2
  circle w0.254: c177.165,167.261 r2
  circle w0.254: c177.438,2.932 r2
  circle w0.254: c15.638,2.962 r1.871
  lines w1.016: 0,1.547 1.319,0.229 179.098,0.229 180.238,1.369 180.238,168.696 178.78,170.155 1.25,170.155 0,168.905 0,1.547

## Silkscreen, mask and mechanical layers (free items; w line width, h text height)
Top Overlay:
  drawing of 24 lines, arcs and shapes, not listed
  text "+" at 131.86,156.593 h3 r270
  text "-" at 40.998,154.46 h3
  text "+" at 131.86,132.552 h3 r270
  text "-" at 41.097,131.31 h3
  text "+" at 131.606,110.077 h3 r270
  text "-" at 41.097,107.456 h3
  text "+" at 131.758,87.097 h3 r270
  text "-" at 41.178,84.57 h3
  text "+" at 131.464,63.48 h3 r270
  text "-" at 41.3,61.319 h3
  text "GND" at 38.521,49.149 h1 r270
  text "TX" at 38.506,46.012 h1 r270
  text "Cell Characterization Board V2" at 126.848,43.915 h3
  text "RX" at 38.506,43.472 h1 r270
  text "NC" at 38.511,40.903 h1 r270
  text "TP_I SENSE" at 12.93,33.958 h0.5 r270
  text "TP_GND" at 2.281,25.31 h0.5 r270
  text "TP_I SENSE RAW" at 8.3,24.751 h0.5
  text "TP_MOS G" at 2.226,22.591 h0.5 r270
  text "TP_CC_OA_FB" at 2.226,19.091 h0.5 r270
  text "TP_I SET" at 2.281,14.979 h0.5 r270
  text "TP_DAC_OUT" at 13.338,13.989 h0.5
  text "SCL" at 4.5,11.959 h1 r270
  text "SDA" at 4.5,8.967 h1 r270
  text "5V" at 4.5,6.1 h1 r270
  text "3.3V" at 143.01,5.26 h1
  text "GND" at 145.44,5.251 h1
  text "MISO" at 147.927,5.251 h1
  text "MOSI" at 150.493,5.251 h1
  text "SCK" at 153.276,5.251 h1
  text "CS" at 156.011,5.251 h1
  text "GND" at 4.5,3.798 h1 r270
  text "TP_3.3V" at 38.081,3.813 h0.5
  text "TP_2.5V" at 8.956,2.054 h0.5
Bottom Overlay:
  text "+" at 40.166,156.921 h3 r270
  text "-" at 132.309,153.948 h3
  text "+" at 40.115,133.782 h3 r270
  text "-" at 132.105,130.47 h3
  text "+" at 40.369,109.906 h3 r270
  text "-" at 132.207,107.466 h3
  text "+" at 41.232,87.757 h3 r270
  text "-" at 132.613,84.606 h3
  text "+" at 40.75,63.779 h3 r270
  text "-" at 132.681,60.821 h3
Board:
  lines w0.254: 0,1.547 0,168.905 0.162,169.067 1.087,169.992 1.25,170.155 178.78,170.155 180.238,168.696 180.238,1.369 178.87,0 1.547,0 0,1.547
Top Designator:
  text "GND" at -4.953,32.06 h0.5

## Text inside footprints (layer, text, board x,y; h text height)
BUCK_IC: Top Assembly "RefDes2" at 158.841,37.409 h0.5 r180; Top Assembly "*" at 158.536,35.644 h0.5 r180; Top Overlay "*" at 159.882,34.437 h0.5 r180
DAC: Top Assembly "*" at 7.345,7.811 h0.5 r270; Top Overlay "*" at 8.945,7.752 h0.5 r270
Logic_Shifter: Top Assembly "*" at 35.11,22.737 h0.5 r180; Top Overlay "*" at 36.447,21.766 h0.5 r180